# Altium PCB PCB1.PcbDoc
Units mil, origin at the board's own origin, x right, y up, seen from the top; angles counter-clockwise.
Board outline 1181.1 x 1594.49 mil, 2 copper layers (Top Layer, Bottom Layer), stack 61.756 mil thick; 54 components, 60 nets, 309 pads, 117 vias.
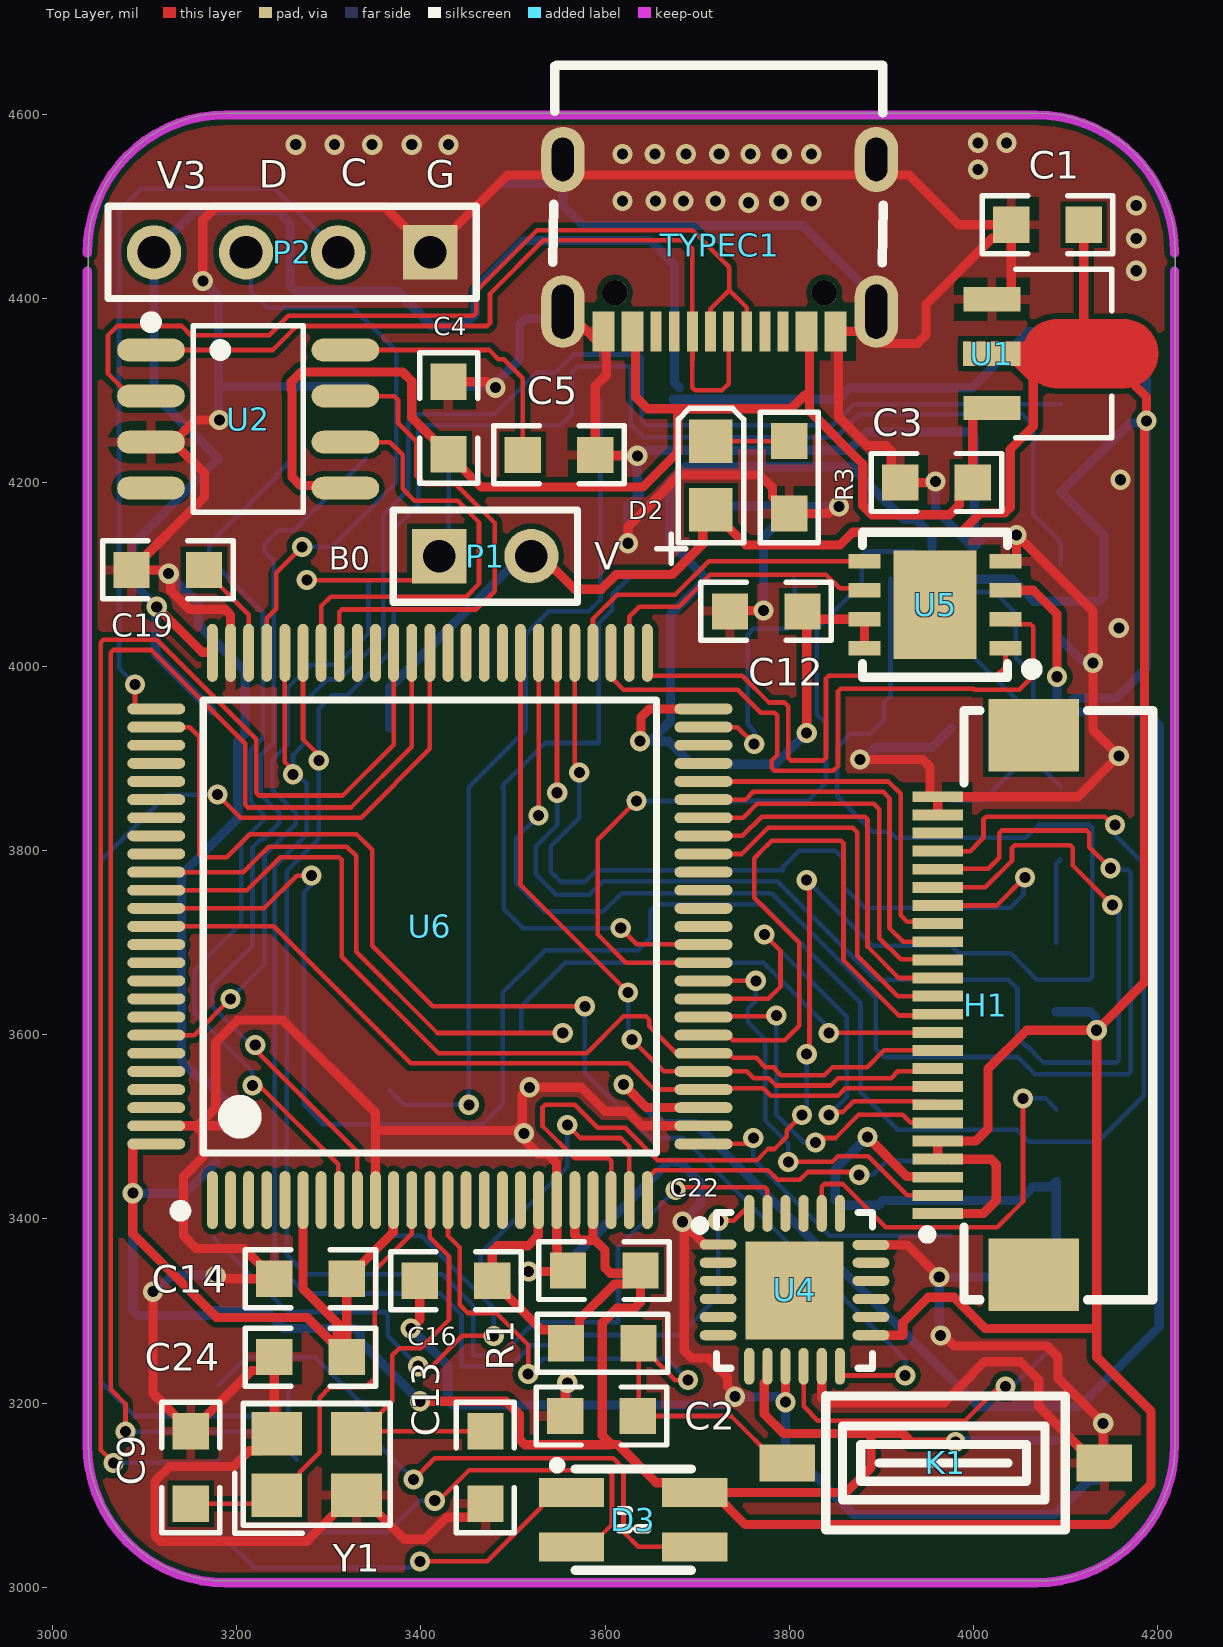
[diagram p0: Top Layer view]
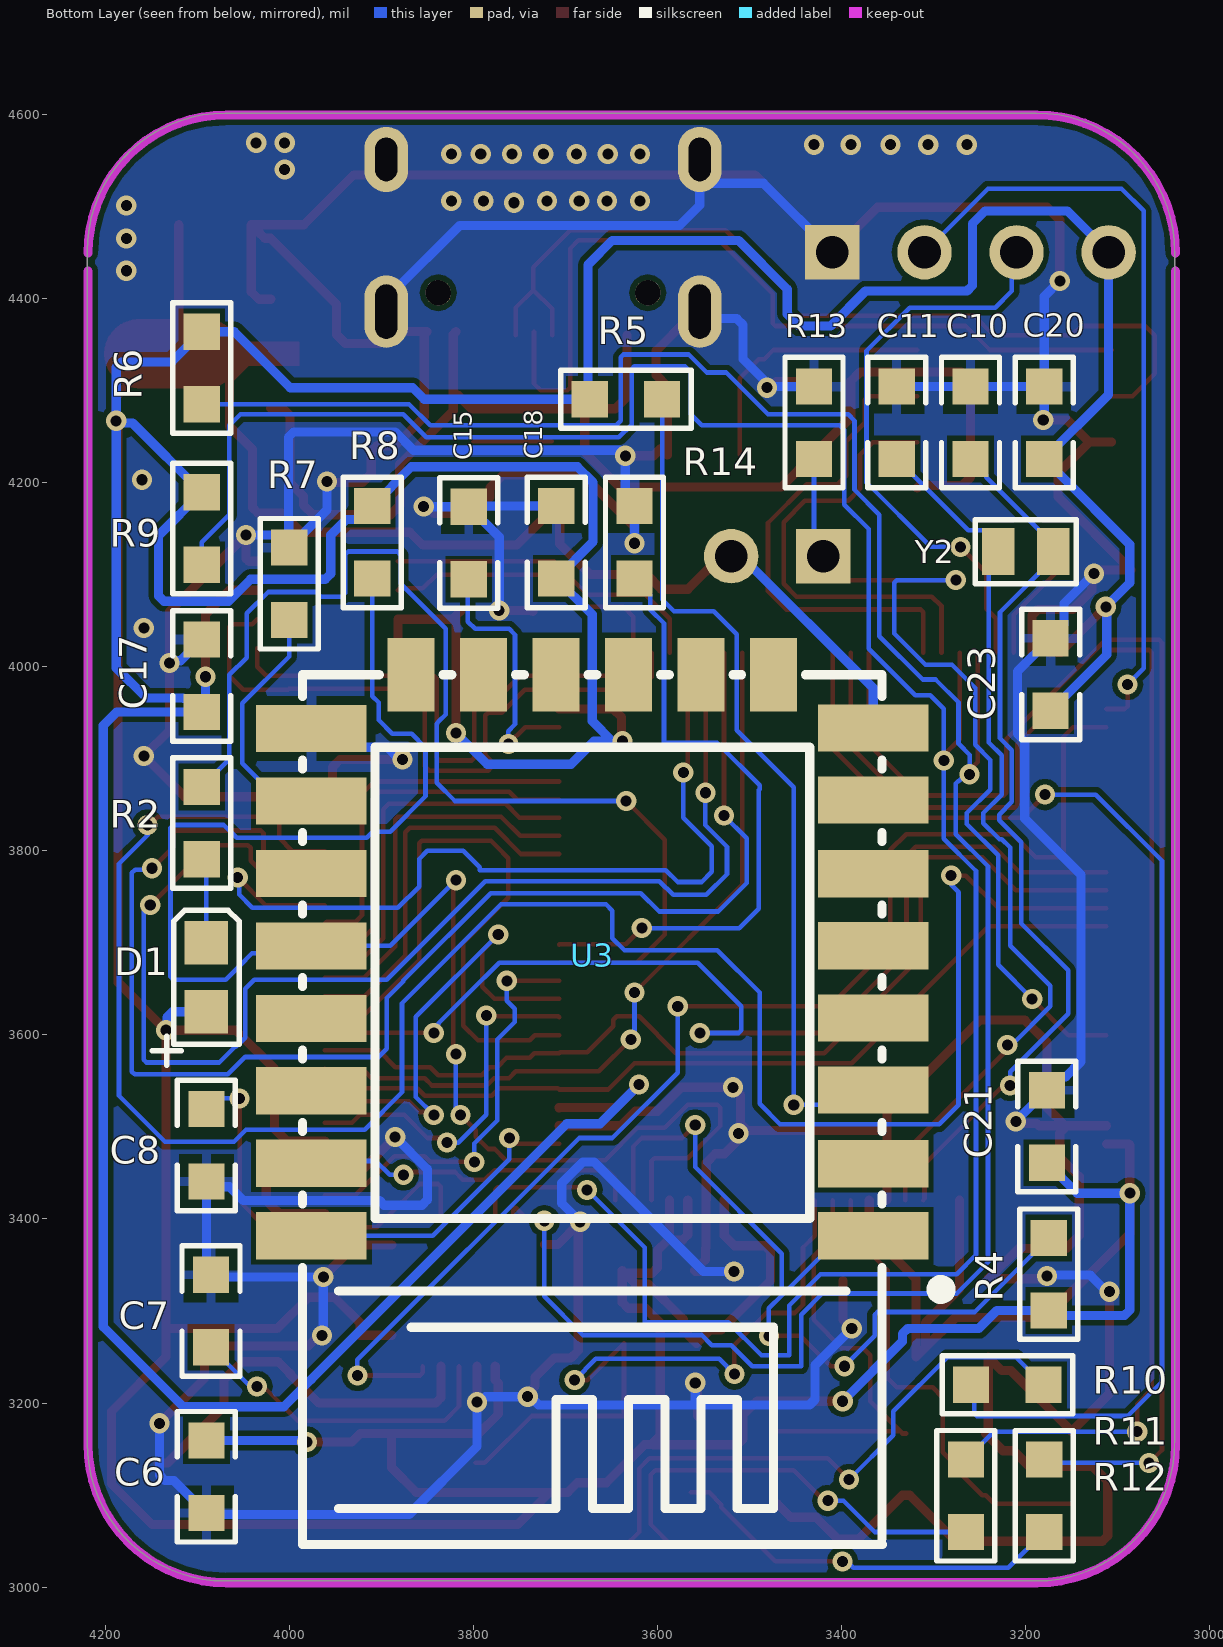
[diagram p1: Bottom Layer view, seen from below]

## Layer stack, top to bottom
Top Solder: solder mask 1, SM-001, Dk 4
Top Layer: signal copper 1.378
Dielectric 1: core 59, Core-043, Dk 4.3
Bottom Layer: signal copper 1.378
Bottom Solder: solder mask 1, SM-001, Dk 4

## Board outline
3038.43,3156.77 ccw(c3188.43,3156.77) 3188.43,3006.77 4069.53,3006.77 ccw(c4069.53,3156.77) 4219.53,3156.77 4219.53,4451.26 ccw(c4069.53,4451.26) 4069.53,4601.26 3188.43,4601.26 ccw(c3188.43,4451.26) 3038.43,4451.26

## Design rules (kind name [scope] priority, off if disabled: settings)
Clearance [All] p1: gap=6 ignorepadtopadclearanceinfootprint=TRUE
PlaneClearance [All] p1: clearance=8
PlaneConnect [All] p1: planeconnectstyle=Direct reliefexpansion=20 reliefentries=4 reliefconductorwidth=10 reliefairgap=10
PolygonConnect [All] p1: thpad.connectstyle=Direct thpad.reliefconductorwidth=10 thpad.reliefentries=4 thpad.polygonreliefangle="90 Angle" thpad.airgapwidth=10 smdpad.connectstyle=Relief smdpad.reliefconductorwidth=10 smdpad.reliefentries=4 smdpad.polygonreliefangle="90 Angle" smdpad.airgapwidth=10 via.connectstyle=Direct via.reliefconductorwidth=10 via.reliefentries=4 via.polygonreliefangle="90 Angle" via.airgapwidth=10
RoutingVias [All] p1: holewidth=12 width=22 viastyle="Through Hole" minholewidth=12 minwidth=22 maxholewidth=12 maxwidth=22
SilkToSolderMaskClearance [IsPad] p1: minsilkscreentomaskgap=2 clearancetoexposedcopper=TRUE
SolderMaskExpansion [All] p1: expansion=4 istentingtop=FALSE
Width PWR_Width [InNetClass('PWR')] p1: maxlimit=10 minlimit=10 preferedwidth=10
Width [All] p2: maxlimit=5 minlimit=5 preferedwidth=5
27 further rules are at their usual default settings.

## Classes and differential pairs
net class PWR: GND V3.3 V5

## Components (designator, comment, footprint, x,y, rotation, side; value= is the part's Value field where it differs from the comment)
C1 "226" 0805C 4080.63,4480 r180 top
C2 "104" 0805C 3596,3186 r0 top
C3 "106" 0805C 3960,4200 r0 top
C4 "104" 0805C 3430,4270 r270 top
C5 "104" 0805C 3550,4230 r180 top
C6 "10nF" 0805C 4090,3120 r270 bottom
C7 "104" 0805C 4085,3300 r90 bottom
C8 "2.2nF" 0805C 4090,3480 r270 bottom
C9 "22pF" 0805C 3150,3130 r270 top
C10 "10pF" 0805C 3260,4265 r270 bottom
C11 "10pF" 0805C 3340,4265 r270 bottom
C12 "104" 0805C 3775,4060 r0 top
C13 "22pF" 0805C 3470,3130 r270 top
C14 "104" 0805C 3280,3335 r0 top
C15 "225" 0805C 3805,4134.37 r270 bottom
C16 "104" 0805C 3438,3333 r0 top
C17 "104" 0805C 4095,3990 r270 bottom
C18 "104" 0805C 3710,4135 r270 bottom
C19 "225" 0805C 3125,4105 r0 top
C20 "104" 0805C 3180,4265 r270 bottom
C21 "104" 0805C 3177,3500.37 r270 bottom
C22 "104" 0805C 3599,3344 r0 top
C23 "104" 0805C 3173.03,3991.38 r270 bottom
C24 "104" 0805C 3280,3250 r0 top
D1 "LED" 0805D 4090,3662.4 r90 bottom
D2 "LED" 0805D 3715,4207.6 r90 top
D3 "RGB" RGB 3630.55,3074.89 r0 top
H1 "LCD_FPC24P" FPC24 4080,3635 r90 top
K1 "KEY" Key3x6x2.5 3970,3135 r90 top
P1 "Header 2" HDR1X2 3420,4120 r0 top
P2 "Header 4" HDR1X4 3410,4450 r180 top
R1 "10k" 0805R 3597,3265 r180 top
R2 "680R" 0805R 4095,3830 r270 bottom
R3 "680R" 0805R 3800,4205.63 r90 top
R4 "10k" 0805R 3175,3340 r270 bottom
R5 "10k" 0805R 3634.37,4290.31 r0 bottom
R6 "4.7k" 0805R 4095,4324.37 r90 bottom
R7 "10k" 0805R 4000,4090 r270 bottom
R8 "10k" 0805R 3910,4135 r90 bottom
R9 "4.7k" 0805R 4095,4150 r90 bottom
R10 "1k" 0805R 3220,3220 r180 bottom
R11 "1k" 0805R 3265,3099.37 r270 bottom
R12 "680R" 0805R 3180,3099.37 r270 bottom
R13 "10k" 0805R 3430,4265 r270 bottom
R14 "10k" 0805R 3625,4135 r270 bottom
TYPEC1 "Typec_16Pin" TYPEC_16PIN 3739.17,4503.31 r180 top
U1 "AMS1117-3.3" SOT-89 4095,4340 r180 top
U2 "CH340N" CH340N 3210,4270 r270 top
U3 "ESP826612E" ESP826612E 3700.55,3630 r90 bottom
U4 "MPU6050" MPU6050 3798.02,3322.99 r270 top
U5 "W25Q64" W25Q64 3958.45,4067.24 r180 top
U6 "STM32F407VE" STM32F407VET6 3405,3740 r0 top
Y1 "OSC25M" OSC25M 3282.19,3128.97 r0 top
Y2 "OSC32K" OSC32K 3203.03,4122.01 r180 bottom

## Footprints (in the part's own frame and the unit in brackets; to place one, negate y for a bottom-side part, rotate by r counter-clockwise, add the part's x,y. Pads: shape width x height; smd on the part's side, far side on the other; paste and mask are expansions set on the pad)
0805C [mm]
  rect 1x1 smd: 1(-1,0) 2(1,0)
  silkscreen extent -1.8,-0.8 1.8,0.8
0805D [mm]
  rect 1.2x1.2 smd: 1(0.95,0) 2(-0.95,0)
  silkscreen extent -2.42,-0.9 1.85,1.49
0805R [mm]
  rect 1x1 smd: 1(-1,0) 2(1,0)
  silkscreen extent -1.8,-0.8 1.8,0.8
CH340N [mm]
  oval 0.63x1.865 smd: 1(-1.877,-2.624) 2(-0.607,-2.624) 3(0.663,-2.624) 4(1.933,-2.624) 5(1.933,2.741) 6(0.663,2.741) 7(-0.607,2.741) 8(-1.877,2.741)
  silkscreen extent -2.79,-2.77 2.6,1.58, body extent -2.67,-2.67 2.92,2.67, height 0.25
ESP826612E [mil]
  rect 51.18x120 smd: 1(-248.25,-334.85) 2(-170,-334.85) 3(-90,-334.85) 4(-11.75,-334.85) 5(66.75,-334.85) 6(145,-334.85) 7(225,-334.85) 8(303.25,-334.85) 15(302.94,275.39) 16(224.19,275.39) 17(145.45,275.39) 18(66.71,275.39) 19(-12.03,275.39) 20(-90.77,275.39) 21(-169.51,275.39) 22(-248.25,275.39)
  rect 80x51.18 smd: 9(361.2,-226.63) 10(361.14,-147.89) 11(361.16,-69.15) 12(361.16,9.59) 13(361.16,88.33) 14(361.19,167.07)
  silkscreen extent -584,-416 361,285, body extent -585,-345 365,285, height 10
FPC24 [mm]
  rect 0.3x1.397 smd: 1(-5.819,3.012) 2(-5.319,3.012) 3(-4.819,3.012) 4(-4.319,3.012) 5(-3.819,3.012) 6(-3.319,3.012) 7(-2.819,3.012) 8(-2.319,3.012) 9(-1.819,3.012) 10(-1.319,3.012) 11(-0.819,3.012) 12(-0.319,3.012) 13(0.181,3.012) 14(0.681,3.012) 15(1.181,3.012) 16(1.681,3.012) 17(2.181,3.012) 18(2.681,3.012) 19(3.181,3.012) 20(3.681,3.012) 21(4.181,3.012) 22(4.681,3.012) 23(5.181,3.012) 24(5.681,3.012)
  rect 2x2.5 smd: ""(-7.509,0.363) ""(7.371,0.363)
  silkscreen extent -8.2,-2.92 8.06,3.43
HDR1X2 [mm] "Connector; Header; 2 Position"
  rect 1.5x1.5 hole 0.9: 1(0,0)
  round 1.5 hole 0.9: 2(2.54,0)
  silkscreen extent -1.27,-1.27 3.81,1.27
HDR1X4 [mm] "Connector; Header; 4 Position"
  rect 1.5x1.5 hole 0.9: 1(0,0)
  round 1.5 hole 0.9: 2(2.54,0) 3(5.08,0) 4(7.62,0)
  silkscreen extent -1.27,-1.27 8.89,1.27
Key3x6x2.5 [mil]
  rect 40x60 smd: 1(0,172.24) 2(0,-172.24)
  silkscreen extent -73,-130 73,130
MPU6050 [mm]
  oval 0.28x1.016 smd: 1(-1.25,-1.911) 2(-0.75,-1.911) 3(-0.25,-1.911) 4(0.25,-1.911) 5(0.75,-1.911) 6(1.25,-1.911) 13(1.25,2.305) 14(0.75,2.305) 15(0.25,2.305) 16(-0.25,2.305) 17(-0.75,2.305) 18(-1.242,2.305)
  oval 1.016x0.28 smd: 7(2.108,-1.053) 8(2.108,-0.553) 9(2.108,-0.053) 10(2.108,0.447) 11(2.108,0.947) 12(2.108,1.447) 19(-2.108,1.447) 20(-2.108,0.947) 21(-2.108,0.447) 22(-2.108,-0.053) 23(-2.108,-0.553) 24(-2.108,-1.053)
  rect 2.7x2.7 smd: ""(0.012,0.197)
  silkscreen extent -2.14,-2.67 2.16,2.35, body extent -2.16,-1.91 2.16,2.29, height 0.25
OSC25M [mm]
  rect 1.4x1.2 smd: 1(-0.986,-0.736) 2(1.214,-0.736) 3(1.214,0.964) 4(-0.986,0.964)
  silkscreen extent -2.14,-1.79 2.14,1.79
OSC32K [mm]
  rect 0.9x1.3 smd: 1(-0.685,0.076) 2(0.839,0.076)
  silkscreen extent -1.32,-0.81 1.47,0.96
RGB [mm]
  rect 1.8x0.8 smd: 1(-1.7,0.713) 2(1.7,0.713) 3(1.7,-0.787) 4(-1.7,-0.787)
  silkscreen extent -2.2,-1.44 1.6,1.56
SOT-89 [mm]
  rect 1.575x0.672 smd: 1(1.901,-1.5) 2(1.905,0) 3(1.901,1.5)
  Top Layer region: -1.739,0.95 0.116,0.95 0.16,0.949 0.204,0.946 0.249,0.941 0.293,0.933 0.336,0.924 0.379,0.913 0.422,0.899 0.464,0.884 0.505,0.867 0.545,0.847 0.584,0.826 0.622,0.804 0.659,0.779 0.695,0.753 0.73,0.725 0.763,0.695 0.795,0.664 0.825,0.631 0.854,0.597 0.881,0.562 0.907,0.525 0.931,0.488 0.953,0.449 0.973,0.409 0.991,0.33 2.688,0.33 2.688,-0.33 0.991,-0.33 0.973,-0.409 0.953,-0.449 0.931,-0.488 0.907,-0.526 0.881,-0.562 0.854,-0.597 0.825,-0.631 0.795,-0.664 0.763,-0.695 0.73,-0.725 0.695,-0.753 0.659,-0.779 0.622,-0.804 0.584,-0.826 0.545,-0.847 0.505,-0.867 0.464,-0.884 0.422,-0.899 0.379,-0.913 0.336,-0.924 0.293,-0.933 0.249,-0.941 0.204,-0.946 0.16,-0.949 0.116,-0.95 -1.739,-0.95 -1.783,-0.949 -1.828,-0.946 -1.872,-0.941 -1.916,-0.933 -1.959,-0.924 -2.002,-0.913 -2.045,-0.899 -2.087,-0.884 -2.128,-0.867 -2.168,-0.847 -2.207,-0.826 -2.245,-0.804 -2.283,-0.779 -2.318,-0.753 -2.353,-0.725 -2.386,-0.695 -2.418,-0.664 -2.449,-0.631 -2.477,-0.597 -2.505,-0.562 -2.53,-0.526 -2.554,-0.488 -2.576,-0.449 -2.596,-0.409 -2.614,-0.369 -2.631,-0.327 -2.645,-0.285 -2.657,-0.242 -2.668,-0.199 -2.676,-0.155 -2.682,-0.111 -2.686,-0.067 -2.688,-0.022 -2.688,0.022 -2.686,0.067 -2.682,0.111 -2.676,0.155 -2.668,0.199 -2.657,0.242 -2.645,0.285 -2.631,0.327 -2.614,0.369 -2.596,0.409 -2.576,0.449 -2.554,0.488 -2.53,0.525 -2.505,0.562 -2.477,0.597 -2.449,0.631 -2.418,0.664 -2.386,0.695 -2.353,0.725 -2.318,0.753 -2.283,0.779 -2.245,0.804 -2.207,0.826 -2.168,0.847 -2.128,0.867 -2.087,0.884 -2.045,0.899 -2.002,0.913 -1.959,0.924 -1.916,0.933 -1.872,0.941 -1.828,0.946 -1.783,0.949
  silkscreen extent -1.41,-2.33 1.25,2.33
STM32F407VET6 [mm]
  oval 0.3x1.6 smd: 1(-5.881,-8.115) 2(-5.381,-8.115) 3(-4.881,-8.115) 4(-4.381,-8.115) 5(-3.881,-8.115) 6(-3.381,-8.115) 7(-2.881,-8.115) 8(-2.381,-8.115) 9(-1.881,-8.115) 10(-1.381,-8.115) 11(-0.881,-8.115) 12(-0.381,-8.115) 13(0.119,-8.115) 14(0.619,-8.115) 15(1.119,-8.115) 16(1.619,-8.115) 17(2.119,-8.115) 18(2.619,-8.115) 19(3.119,-8.115) 20(3.619,-8.115) 21(4.119,-8.115) 22(4.619,-8.115) 23(5.119,-8.115) 24(5.619,-8.115) 25(6.119,-8.115) 51(6.119,6.985) 52(5.619,6.985) 53(5.119,6.985) 54(4.619,6.985) 55(4.119,6.985) 56(3.619,6.985) 57(3.119,6.985) 58(2.619,6.985) 59(2.119,6.985) 60(1.619,6.985) 61(1.119,6.985) 62(0.619,6.985) 63(0.119,6.985) 64(-0.381,6.985) 65(-0.881,6.985) 66(-1.381,6.985) 67(-1.881,6.985) 68(-2.381,6.985) 69(-2.881,6.985) 70(-3.381,6.985) 71(-3.881,6.985) 72(-4.381,6.985) 73(-4.881,6.985) 74(-5.381,6.985) 75(-5.881,6.985)
  oval 1.6x0.3 smd: 26(7.669,-6.565) 27(7.669,-6.065) 28(7.669,-5.565) 29(7.669,-5.065) 30(7.669,-4.565) 31(7.669,-4.065) 32(7.669,-3.565) 33(7.669,-3.065) 34(7.669,-2.565) 35(7.669,-2.065) 36(7.669,-1.565) 37(7.669,-1.065) 38(7.669,-0.565) 39(7.669,-0.065) 40(7.669,0.435) 41(7.669,0.935) 42(7.669,1.435) 43(7.669,1.935) 44(7.669,2.435) 45(7.669,2.935) 46(7.669,3.435) 47(7.669,3.935) 48(7.669,4.435) 49(7.669,4.935) 50(7.669,5.435) 76(-7.431,5.435) 77(-7.431,4.935) 78(-7.431,4.435) 79(-7.431,3.935) 80(-7.431,3.435) 81(-7.431,2.935) 82(-7.431,2.435) 83(-7.431,1.935) 84(-7.431,1.435) 85(-7.431,0.935) 86(-7.431,0.435) 87(-7.431,-0.065) 88(-7.431,-0.565) 89(-7.431,-1.065) 90(-7.431,-1.565) 91(-7.431,-2.065) 92(-7.431,-2.565) 93(-7.431,-3.065) 94(-7.431,-3.565) 95(-7.431,-4.065) 96(-7.431,-4.565) 97(-7.431,-5.065) 98(-7.431,-5.565) 99(-7.431,-6.065) 100(-7.431,-6.565)
  silkscreen extent -6.91,-8.56 6.37,5.69, body extent -7.62,-7.62 7.75,6.98, height 0.25
TYPEC_16PIN [mm]
  rect 0.6x1.1 smd: 1(-2.824,3.54) 2(-2.024,3.54) 11(2.776,3.54) 12(3.576,3.54)
  rect 0.3x1.1 smd: 3(-1.374,3.54) 4(-0.874,3.54) 5(-0.374,3.54) 6(0.126,3.54) 7(0.626,3.54) 8(1.126,3.54) 9(1.626,3.54) 10(2.126,3.54)
  oval 1.2x2 hole 0.6 slot 1.5 at 90 deg: 13(-3.949,2.99) 14(4.701,2.99)
  oval 1.2x1.8 hole 0.6 slot 1.2 at 90 deg: 15(-3.949,-1.21) 16(4.701,-1.21)
  round 0.7 hole 0.7 unplated: ""(-2.514,2.47) ""(3.266,2.47)
  silkscreen extent -4.14,-3.81 4.98,1.65, body extent -5.65,-4 5.91,3.24, height 0.25
W25Q64 [mm]
  rect 0.889x0.4 smd: 1(-1.944,1.2) 2(-1.944,0.4) 3(-1.944,-0.4) 4(-1.944,-1.2) 5(1.944,-1.2) 6(1.944,-0.4) 7(1.944,0.4) 8(1.944,1.2)
  rect 2.3x3 smd: ""(0,0)
  silkscreen extent -2.82,-2 2,2, body extent -2.03,-2.03 2.79,2.41, height 0.25

## Part data
C1 C2 C3 C4 C5 C6 C7 C8 C9 C10 C11 C12 C13 C14 C15 C16 C17 C18 C19 C20 C21 C22 C23 C24: library part CAP, "电容"
D1 D2: "LED灯"
K1: "按键"
P1: "Header, 2-Pin", LatestRevisionDate=17-Jul-2002, LatestRevisionNote="Re-released for DXP Platform.", Publisher="Altium Limited"
P2: "Header, 4-Pin", LatestRevisionDate=17-Jul-2002, LatestRevisionNote="Re-released for DXP Platform.", Publisher="Altium Limited"
R1 R2 R3 R4 R5 R6 R7 R8 R9 R10 R11 R12 R13 R14: library part RES, "电阻"
U1: "IC"
U6: library part STM32F407VET6

## Via types
v1: diameter 22, hole 12, Top Layer to Bottom Layer, tented both sides, 117 vias

## Nets (pads, with @x,y where several pads share a name; then routed paths per layer and width w, separated by ;. In a path a pad name is that pad's centre, name@x,y a point inside that pad or via, vN(x,y) a via of type N, cw(c..) or ccw(c..) an arc to the next point about the centre after c; other vN are vias at no path point)
BOOT0: P1.1 R13.2 U6.94 | length 981.7
  Top Layer w5: U6.94 3153.65,3599.65 v1(3193,3639) ; v1(3276,4094) 3394,4094 P1.1
  Bottom Layer w5: v1(3193,3639) 3230,3676 3230,3795 3264,3829 3264,3841 3238.61,3866.39 3238.61,3898.61 3255,3915 3255,3976.75 3280.12,4001.88 3308.88,4001.88 3343,4036 3343,4091.07 3340.07,4094 v1(3276,4094) ; P1.1 3430,4130 R13.2
ESP_IO0: R8.1 U3.18 U6.23 | length 1838.6
  Top Layer w5: U6.23 3606.53,3463.07 3603.6,3466 3567,3466 3532,3501 3532,3521.07 3534.93,3524 3567,3524 3592,3499 3621.93,3499 3656.93,3464 3765,3464 3777,3476 3784,3476 3797.37,3489.37 3797.37,3496.37 v1(3814,3513) ; v1(3819,3579) 3822,3582 3822,3765 v1(3819,3768)
  Bottom Layer w5: v1(3814,3513) 3819,3518 v1(3819,3579) ; v1(3819,3768) 3890.29,3696.71 U3.18 3984.17,3688.49 4040.51,3688.49 4054,3675 4069,3660 4126.07,3660 4129,3662.93 4129,3825.07 4126.07,3828 4071,3828 4057,3814 3916,3814 3909.5,3820.5 3890.5,3820.5 3852,3859 3852,3912 3867,3927 3888,3927 3903,3942 3903,3961 3910,3968 R8.1
ESP_RST: R4.1 U3.1 U6.24 | length 923.9
  Top Layer w5: v1(3397,3240) 3412,3240 3445,3273 v1(3479,3273) ; v1(3559,3502) 3573,3488 3617,3488 3626.22,3478.78 U6.24
  Bottom Layer w5: R4.1 3255.37,3299 3361.07,3299 3364,3296.07 3364,3273 v1(3397,3240) ; U3.1 3400.11,3381.75 3465,3316.87 ; v1(3479,3273) 3479,3302.87 3465,3316.87 ; v1(3559,3502) 3559,3456.43 3465,3362.43 3465,3316.87
FLASH_CS: U5.1 U6.51 | length 595.9
  Top Layer w5: U6.51 3645.9,3993.15 3649.05,3990 3749,3990 3778,3961 3795,3961 3799,3957 3799,3900.93 3801.93,3898 3837,3898 3840,3901 3840,3987.07 3842.93,3990 4025,3990 4035,4000 U5.1
FLASH_MISO: U5.2 U6.53 | length 746.6
  Top Layer w5: U6.53 3606.53,3988.47 3620,3975 3744,3975 3769,3950 3784.07,3950 3787,3947.07 3787,3904 3781.04,3898.04 3781.04,3889.93 3783.96,3887 3848,3887 3853,3892 3853,3973.07 3855.93,3976 4000.33,3976 4001.33,3975 4050,3975 4065,3990 4065,4043.19 4062.07,4046.12 4040.37,4046.12 U5.2
FLASH_MOSI: U5.5 U6.54 | length 357.8
  Top Layer w5: U6.54 3586.85,4051.85 3613,4078 3676,4078 3712.49,4114.49 U5.5
FLASH_SCL: U5.6 U6.52 | length 321.5
  Top Layer w5: U6.52 3626.22,4054.22 3637,4065 3680,4065 3702,4087 3702,4088 3714,4100 3840,4100 3855,4085 3879.88,4085 U5.6
FSMC_D8: H1.13 U6.42 | length 420.5
  Top Layer w5: U6.42 3748.5,3796.5 3777,3825 3869,3825 3874,3820 3874,3686 3917.87,3642.13 H1.13
FSMC_D9: H1.14 U6.43 | length 416.5
  Top Layer w5: U6.43 3749.19,3816.19 3770,3837 3882,3837 3885,3834 3885,3696 3919.19,3661.81 H1.14
FSMC_D10: H1.15 U6.44 | length 413
  Top Layer w5: U6.44 3749.87,3835.87 3765,3851 3892,3851 3898,3845 3898,3705 3921,3682 3960.91,3682 H1.15
FSMC_D11: H1.16 U6.45 | length 408
  Top Layer w5: U6.45 3752.56,3855.56 3761,3864 3902,3864 3909,3857 3909,3716 3923.82,3701.18 H1.16
FSMC_D12: H1.17 U6.46 | length 395.8
  Top Layer w5: U6.46 3907.76,3875.24 3921,3862 3921,3730 3928,3723 3959.28,3723 H1.17
FSMC_D13: H1.18 U6.55 | length 962.3
  Top Layer w5: U6.55 3567.16,3894.44 3572,3889.6 v1(3572,3885) ; H1.18 4025.55,3740.55 v1(4056,3771)
  Bottom Layer w5: v1(3572,3885) 3572,3836 3541,3805 3541,3777 3552,3766 3578,3766 3591,3779 3793,3779 3793,3782 3811,3800 3850,3800 3859,3791 3859,3761 3882,3738 4040,3738 4054.5,3752.5 4054.5,3769.5 v1(4056,3771)
FSMC_D14: H1.19 U6.56 | length 1439.1
  Top Layer w5: U6.56 3547.74,4014.74 3547.74,3863.26 v1(3548,3863) ; H1.19 4013,3760.24 4042,3789.24 4042,3803.07 4044.93,3806 4105.07,3806 4108,3803.07 4108,3784 v1(4151,3741)
  Bottom Layer w5: v1(3548,3863) 3548,3828 3524.5,3804.5 3524.5,3774.5 3547,3752 3583,3752 3598,3767 3787,3767 3894,3660 4038,3660 4048,3650 4048,3597 4058,3587 4059,3587 4076,3570 4155.07,3570 4158,3572.93 4158,3734 v1(4151,3741)
FSMC_D15: H1.20 U6.57 | length 1552.6
  Top Layer w5: v1(3527.79,3838.21) U6.57 ; H1.20 3961.96,3780.46 4016,3780.46 4028,3792.46 4028,3819.07 4030.93,3822 4123.07,3822 4126,3819.07 4126,3804 4148.46,3781.54 4148.46,3780.46 v1(4149,3781)
  Bottom Layer w5: v1(3527.79,3838.21) 3503,3813.42 3503,3765 3534,3734 3598,3734 3618,3754 3781,3754 3876,3659 3876,3658 3894,3640 3894,3585 3903,3576 4048,3576 4067,3557 4168,3557 4171,3560 4171,3776 4167.5,3779.5 4150.5,3779.5 v1(4149,3781)
FSMC_RD: H1.11 U6.85 | length 1177.5
  Top Layer w5: U6.85 3206.82,3776.82 3221,3791 3234.5,3804.5 3319.5,3804.5 3329.59,3794.41 3329.59,3690.41 3418,3602 v1(3554,3602) ; v1(3843,3602) 3843.38,3602.38 3961.04,3602.38 H1.11
  Bottom Layer w5: v1(3554,3602) 3511.93,3602 3509,3604.93 3509,3631 3556.5,3678.5 3772.08,3678.5 3805.91,3644.66 3837.71,3612.87 3837.71,3611.89 3843,3606.6 v1(3843,3602)
GND: C1.2 C2.1 C3.1 C4.1 C5.1 C6.2 C7.2 C8.2 C9.1 C10.1 C11.1 C12.1 C13.2 C14.1 C15.1 C16.1 C17.1 C18.1 C19.1 C20.1 C21.1 C22.1 C23.1 C24.1 H1.3 H1.23 H1.24 K1.2 P2.1 R3.1 R7.1 R13.1 R14.1 TYPEC1.1 TYPEC1.12 TYPEC1.13 TYPEC1.14 TYPEC1.15 TYPEC1.16 U1.1 U2.3 U3.15 U4.1 U4.9 U4.11 U4.18 U5.4 U6.10 U6.20 U6.27 U6.74 U6.99 Y1.2 Y1.4 | length 12102.9
  Top Layer w10: U2.3 U2.3@3131.02,4243.88 ; v1(3109,3321) 3109,3210.37 C9.1 3215.94,3235.31 3225.94,3235.31 C24.1 3240.63,3169.69 Y1.4 3224.76,3148.31 3213.31,3148.31 3196,3131 3127,3131 3111,3115 3111,3055.86 3116.86,3050 3276.06,3050 3326.06,3100 Y1.2 3333.94,3100 3381.94,3052 3404,3052 3427.94,3075.94 3455.31,3075.94 C13.2 ; U6.99 3154.78,3501.22 ; v1(3163,4419) 3163,4485 3177,4499 3361,4499 3404,4456 3416,4456 3494.14,4534.14 3506.22,4534.14 3930,4534.13 3984.13,4480 C1.2@4035,4480 ; v1(3177,3338) 3180,3335 C14.1 3207.63,3368 3156,3368 3142,3382 3142,3446 3163,3467 3163,3493 3154.78,3501.22 ; v1(3181,4268) 3180.86,4267.86 3155,4267.86 U2.3@3131.02,4243.88 ; U6.74 3193.14,4055.86 3187,4062 3149,4062 3128.3,4082.7 3128.3,4098.7 v1(3126,4101) 3122.75,4101 3118.75,4105 C19.1 3165,4184.37 3165,4209.9 U2.3@3131.02,4243.88 ; v1(3210.74,3506) 3208.44,3503.7 3187.99,3503.7 3185.5,3501.22 3157.22,3501.22 ; U6.10 3350.62,3496 ; v1(3389,3281) 3398.63,3290.63 C16.1 ; C4.1 3471.38,4309.37 3477.75,4303 v1(3481,4303) ; v1(3517,3343) 3558.63,3343 C22.1 3548,3355.63 3548,3368 3547.48,3368.52 U6.20 3547.13,3420.87 3547.13,3460.87 3537.2,3470.8 3527.2,3470.8 v1@3502,3496 ; C2.1 3556.63,3219.63 v1(3559,3222) ; TYPEC1.14@3568.03,4376.65 3601.5,4343.19 3601.5,4316.81 3589.37,4304.69 C5.1 3596.37,4237 3604.37,4229 v1(3635,4229) ; v1(3625,4134) 3625,4152 3673,4200 3673,4201 3680,4208 3768,4208 3782,4194 3782,4184.26 R3.1 3843.01,4166.26 3850.75,4174 v1(3854,4174) ; v1(3684,3397) 3686,3395 v1@3686,3394.49 ; U6.27 3639.78,3501.22 3624,3517 3600,3517 3574,3543 v1(3518,3543) 3510,3535 3510,3504 v1@3502,3496 ; U4.1 3708.3,3372.19 v1@3686,3394.49 ; C12.1 3736.63,4061 v1(3772,4061) ; v1(3741,3207) 3741,3210.25 3733,3218.25 3733,3228 3712,3249 3694,3249 3686,3257 v1@3686,3394.49 ; v1(3795.95,3201.05) U4.9 ; U4.11 3835.32,3205.86 3841.18,3200 3968,3200 3999,3231 3999,3232 4012,3245 4051.14,3245 4071,3225.14 4071,3196.24 4132.24,3135 K1.2 4141,3136.24 v1(4141,3178) 4092,3227 4092,3250 4080,3262 3979.25,3262 3967.75,3273.5 v1(3964.5,3273.5) ; v1(3877,3899) 3945,3899 3953,3891 3953,3859.57 3953.91,3858.66 H1.24 ; v1(3885,3489) 3927.82,3446.18 3960.51,3446.18 H1.3 ; U4.18 3928.12,3371.88 v1(3963,3337) ; TYPEC1.13@3894.65,4358.03 3901.68,4351 3939,4351 3948.74,4360.74 3948.74,4393.74 4020.31,4465.31 4026.57,4465.31 4035,4473.74 C1.2@4035,4480 ; TYPEC1.13 3894.65,4381.15 3877.44,4363.94 TYPEC1.1 3853.46,4360.83 3853.46,4271.54 3885,4240 3905,4240 3910.86,4234.14 3910.86,4209.77 C3.1 3958,4200 v1(3959,4201) ; H1.23 H1.24 ; U1.1 4033.03,4399.04 4041.26,4407.27 C1.2 C1.2@4035,4480 ; U5.4 4044.13,4114.49 4047,4117.36 v1(4047,4143) 4130,4060 v1(4130,4004) 4130,3931 v1(4158,3903) 4113.66,3858.66 H1.24 ; 3154.78,3501.22 3157.22,3501.22 ; 3157.22,3501.22 3177,3521 3177,3592 3201,3616 3250,3616 3350.62,3515.38 3350.62,3496 ; 3350.62,3496 v1@3502,3496
  Bottom Layer w10: v1(3109,3321) 3112,3321 3130,3339 3176,3339 v1(3177,3338) ; v1(3126,4101) 3158.35,4068.65 3158.35,4045.43 C23.1 3209,3994.78 3209,3927 3201,3919 3201,3835 3140,3774 3140,3571 3156.57,3554.43 3162.31,3554.43 v1(3210.74,3506) ; v1(3163,4419) 3180,4402 C20.1 ; v1(3181,4268) 3180,4269 C20.1 ; C11.1 C10.1 C20.1 ; v1(3389,3281) 3429,3241 3429,3203.86 3434.86,3198 3559,3198 ; P2.1 3485,4525 3529.2,4525 3529.3,4525.1 3552.38,4525.1 3554.09,4523.39 3554.09,4501.27 3576,4479.36 3576,4479.15 3814.85,4479.15 3887.52,4406.48 3887.52,4365.16 TYPEC1.13@3894.65,4358.03 ; R13.1 v1@3477.37,4304.37 ; v1@3478.5,4305.5 3507,4334 3507,4371 3514,4378 3546.5,4378 TYPEC1.14 ; v1(3517,3343) 3550,3343 3669,3462 3681,3462 3704,3439 3704,3417 v1(3684,3397) ; v1(3559,3222) 3559,3198 ; v1(3625,4134) R14.1 3638,4187.37 3635,4190.37 v1(3635,4229) 3641,4235 3865,4235 3885,4255 3995.14,4255 4001,4249.14 R7.1@4001,4130.37 ; C18.1 C15.1@3804.37,4174.37 ; v1(3772,4061) 3772,4140.74 3804.37,4173.11 C15.1@3804.37,4174.37 ; v1(3854,4174) 3853.74,4173.74 C15.1 C15.1@3804.37,4174.37 ; v1(3877,3899) 3880.25,3899 3893.6,3912.35 3955.35,3912.35 U3.15 ; v1(3885,3489) 3850,3454 3850,3420.86 3855.86,3415 3897,3415 3902,3420 4050,3420 4065,3435 4084.37,3435 C8.2 4090,3344.37 C7.2 4082.63,3337 v1(3963,3337) 3963,3275 v1(3964.5,3273.5) v1@3966,3272 ; v1(3959,4201) 3959,4170.37 R7.1 R7.1@4001,4130.37 ; v1(4047,4143) 4013.63,4143 R7.1@4001,4130.37 ; C17.1 4118.07,4006.3 4127.7,4006.3 v1(4130,4004) ; v1(4141,3178) 4141,3121.86 4135.14,3116 4125.37,3116 C6.2 4088.37,3079 3870,3079 3795.95,3153.05 v1(3795.95,3201.05) 3792.7,3201.05 3786.75,3207 3738.14,3207 3729.14,3198 3559,3198
  other v1: 3512,3493 4158,4042 4160,4203 4177,4430 4177,4465 4177,4501 3756,4503.87 3619,4505.87 3655,4505.87 3685,4505.87 3720,4505.87 3789,4505.87 3824,4505.87 4005,4540 3619,4556.87 3654,4556.87 3688,4556.87 3724,4556.87 3758,4556.87 3792,4556.87 3824,4556.87 3264,4567 3306,4567 3347,4567 3390,4567 3430,4567 4005,4569 4036,4569
IMU_IT: U4.12 U6.77 | length 1393.5
  Top Layer w5: U6.77 3148.7,3934.3 3159,3924 3159,3795.93 3161.93,3793 3189,3793 3214,3818 3330,3818 3347,3801 3347,3697 3413,3631 v1(3578,3631) ; U4.12 3855,3232.78 3857.78,3230 v1(3926,3230)
  Bottom Layer w5: v1(3578,3631) 3578,3559 3649,3488 3685.09,3488 3926,3247.09 v1(3926,3230)
IMU_SCL: R9.1 U4.23 U6.70 | length 2807.6
  Top Layer w5: U6.70 3271.88,3921.12 3289,3904 v1(3289,3898) ; v1(3676.5,3431.5) 3679.48,3434.48 3773.33,3434.48 3776.26,3431.55 U4.23
  Bottom Layer w5: v1(3676.5,3431.5) 3614,3369 3614,3288 3523,3288 3487,3252 3457,3252 3457,3306 3423,3340 3275,3340 3254,3361 3254,3778 3289,3813 v1(3289,3898) 3289,3954.15 3303.85,3969 3320,3969 3370.5,4019.5 3370.5,4149.5 3397,4176 3397,4257 3402,4262 3552,4262 3564,4274 3564,4320 3570.14,4326.14 3625.05,4326.14 3628,4323.2 3628,4262.93 3641.93,4249 3851,4249 3876,4274 4053,4274 4065,4262 4065,4165 4095,4135 R9.1
IMU_SDA: R6.1 U4.24 U6.71 | length 2672.8
  Top Layer w5: U6.71 3252.2,3896.4 3261,3887.6 v1(3261,3883) ; v1(3723,3398) 3739.8,3398 3753.8,3412 3756.58,3409.22 U4.24
  Bottom Layer w5: v1(3723,3398) 3723,3316 3681,3274 3552,3274 3541,3263 3520,3263 3497,3240 3444,3240 3444,3296 3421,3319 3275,3319 3241,3353 3241,3783 3276,3818 3276,3873 3272.79,3876.21 3272.39,3876.21 3265.6,3883 v1(3261,3883) 3261,3904 3273,3916 3273,3961 3298,3986 3312,3986 3359,4033 3359,4165 3386,4192 3386,4267 3393,4274 3480,4274 3525.5,4319.5 3546.5,4319.5 3566,4339 3637.07,4339 3640,4336.07 3640,4267 3645,4262 3847,4262 3870,4285 R6.1
LCD_BLK: H1.2 U6.35 | length 457.8
  Top Layer w5: U6.35 v1(3763.7,3658.7) ; v1(3799,3462) 3847,3462 3853,3468 3886,3468 3928.41,3425.59 H1.2
  Bottom Layer w5: v1(3763.7,3658.7) 3763.7,3637 3755,3628.3 3755,3614 3774,3595 3774,3507 3799,3482 v1(3799,3462)
LCD_CS: H1.8 U6.29 U6.88 | length 930.2
  Top Layer w5: U6.88 3240.24,3717.76 3389,3569 3625,3569 3653.41,3540.59 U6.29 3708.22,3541.89 3772,3541.89 3779.89,3534 3853,3534 3860.89,3541.89 3959.61,3541.89 H1.8
LCD_DC: H1.10 U6.31 U6.86 | length 1073.2
  Top Layer w5: U6.86 3211,3757.13 3246.93,3793.07 3310.93,3793.07 3314,3790 3314,3685 3419,3580 3580,3580 3620,3620 3644.4,3620 3647.97,3616.43 3647.97,3609.47 3672,3585.45 3676.18,3581.26 3705.62,3581.26 U6.31 3733.89,3579.96 3738.84,3575 3764,3575 3774,3565 3784,3565 3784,3563 3791,3556 3838,3556 3847,3565 3884.88,3565 3902.95,3583.07 H1.10
LCD_IM: H1.6 U6.33 | length 391.4
  Top Layer w5: U6.33 3707.76,3620.16 3785.16,3620.16 v1(3786,3621) ; v1(3828.6,3483) 3833.6,3488 3850.3,3488 3875.3,3513 3923.2,3513 3931.87,3504.33 H1.6
  Bottom Layer w5: v1(3786,3621) 3786,3513.42 3816.42,3483 v1(3828.6,3483)
LCD_RST: H1.7 U6.34 | length 520.4
  Top Layer w5: U6.34 3777.07,3639.02 3790.5,3652.45 3790.5,3691.5 v1(3773,3709) ; v1(3843,3513) 3846.25,3516.25 3858.25,3516.25 3870,3528 3933.49,3528 3934.07,3527.42 3958.01,3527.42 H1.7
  Bottom Layer w5: v1(3773,3709) 3862.5,3619.5 3862.5,3532.5 v1(3843,3513)
LCD_SCL: H1.9 U6.30 U6.58 | length 830.8
  Top Layer w5: U6.58 3508.11,3762.89 v1(3625,3646) ; v1(3629,3595) 3663.72,3560.28 U6.30 3754,3560.28 3761.28,3553 3777.64,3553 3785.64,3545 3845,3545 3853,3553 3910.72,3553 3918,3560.28 3958.31,3560.28 H1.9
  Bottom Layer w5: v1(3625,3646) 3625,3599 v1(3629,3595)
LCD_SDA: H1.12 U6.32 | length 676.4
  Top Layer w5: U6.32 3733.2,3599.65 3738.84,3594 3795,3594 3811,3610 3811,3700 3762,3749 3762,3792 3768,3798 3768,3798.07 3780.93,3811 3856.07,3811 3859,3808.07 3859,3681 3919,3621 3959.98,3621 H1.12
LCD_TE: H1.21 U6.87 | length 2258.5
  Top Layer w5: U6.87 3229.45,3737.45 3265,3773 v1(3281,3773) ; H1.21 3996.61,3799.61 4011,3814 4011,3834.07 4013.93,3837 4142.57,3837 4151.57,3828 v1(4154,3828)
  Bottom Layer w5: v1(3281,3773) 3281,3763 3273,3755 3273,3524 3294,3503 3467,3503 3489,3525 3489,3646 3535,3692 3635.86,3692 3649,3705.14 3649,3735 3656,3742 3770,3742 3877.5,3634.5 3877.5,3537.5 3918,3497 4047,3497 4060,3484 4135,3484 4185,3534 4185,3786 4154,3817 v1(4154,3828)
LED_B: R10.1 U6.63 | length 1352.1
  Top Layer w5: v1(3179,3861) 3204,3836 3335,3836 3409.68,3910.68 U6.63
  Bottom Layer w5: v1(3179,3861) 3124,3861 3052,3789 3052,3223 3089,3186 3253.07,3186 3256,3188.93 3256,3216.63 R10.1
LED_G: R11.1 U6.64 | length 1618.3
  Top Layer w5: v1(3079,3169) 3079,3199 3063,3215 3063,4015.07 3065.93,4018 3107,4018 3209,3916 3209,3849.93 3211.93,3847 3324,3847 3390,3913 U6.64
  Bottom Layer w5: v1(3079,3169) 3234.74,3169 R11.1
LED_R: R12.1 U6.65 | length 1558.6
  Top Layer w5: v1(3066,3135) 3052,3149 3052,4026.07 3054.93,4029 3113,4029 3221,3921 3221,3862.93 3223.93,3860 3315,3860 3370.31,3915.31 U6.65
  Bottom Layer w5: v1(3066,3135) 3176.26,3135 R12.1
NetC5_2: C5.2 U2.8 | length 288.7
  Top Layer w5: U2.8 3474.16,4343.88 3484.04,4334 3490,4334 3510.63,4313.37 C5.2
NetC7_1: C7.1 U4.10 | length 352.4
  Top Layer w5: U4.10 3815.63,3196.37 3831,3181 3991,3181 4028,3218 v1(4035,3218)
  Bottom Layer w5: v1(4035,3218) 4042.37,3218 C7.1
NetC8_1: C8.1 U4.20 | length 432.9
  Top Layer w5: U4.20 3835.32,3435.07 3838.25,3438 3858,3438 3905,3391 4026,3391 4054,3419 v1(4054,3531)
  Bottom Layer w5: v1(4054,3531) 4078.37,3531 C8.1
NetC15_2: C15.2 U6.49 | length 287.9
  Top Layer w5: U6.49 3743.7,3934.3 v1(3762,3916)
  Bottom Layer w5: v1(3762,3916) 3762,3930 3754.79,3937.21 3754.79,4034.68 3761.11,4041 3798.07,4041 3806,4048.93 3806,4094 C15.2
NetC19_2: C19.2 U6.73 | length 110.1
  Top Layer w5: C19.2 3212.83,4056.54 U6.73
NetD1_1: D1.1 R2.2 | length 92.9
  Bottom Layer w5: D1.1 4090,3785.63 R2.2
NetD2_1: D2.1 R3.2 | length 85
  Top Layer w5: D2.1 R3.2
NetD3_1: D3.1 R12.2 | length 435.5
  Top Layer w5: v1(3399,3028) 3472,3028 3530.69,3086.69 3530.69,3089.73 3543.94,3102.98 D3.1
  Bottom Layer w5: R12.2 3219,3021 3387.4,3021 3394.4,3028 v1(3399,3028)
NetD3_3: D3.3 R10.2 | length 689.3
  Top Layer w5: v1(3392,3117) 3415,3140 3609,3140 3620,3129 3620,3060 3636.08,3043.92 D3.3
  Bottom Layer w5: R10.2 3210.63,3250 3285,3250 3343.91,3191.09 3343.91,3165.09 v1(3392,3117)
NetD3_4: D3.4 R11.2 | length 480.5
  Top Layer w5: v1(3415,3094) 3419,3094 3452.23,3127.23 3602.57,3127.23 3607.55,3122.25 3607.55,3068.17 3583.31,3043.92 D3.4
  Bottom Layer w5: R11.2 3364,3060 3398,3094 v1(3415,3094)
NetR5_1: R5.1 U3.3 | length 943.7
  Bottom Layer w5: U3.3 3381.71,3524 v1(3452,3524) 3452,3869 3514,3931 3514,4035 3539,4060 3582.07,4060 3595,4072.93 R5.1
NetR7_2: R7.2 U3.16 | length 268.8
  Bottom Layer w5: U3.16 4010.35,3854.19 4051,3894.84 4051,3960 4000,4011 R7.2
NetR14_2: R14.2 U6.37 | length 682.3
  Top Layer w5: v1(3617,3716) 3634.46,3698.54 3706.46,3698.54 U6.37
  Bottom Layer w5: v1(3617,3716) 3511,3716 3490,3737 3490,3866 3489.07,3866.93 3489.07,3871.07 3535,3917 3593,3917 3593,4047 3607.81,4061.81 3607.81,4078.44 R14.2
NRST: C2.2 K1.1 R1.1 U6.14 | length 766.2
  Top Layer w5: U6.14 3429.37,3381.63 3442,3369 3442,3306.66 3450.83,3297.83 3481.75,3297.83 3516.46,3263.11 v1(3516.46,3231.54) ; v1(3690,3225) 3676.37,3225 R1.1 3636.37,3187 C2.2 3736.76,3186 3787.76,3135 K1.1
  Bottom Layer w5: v1(3516.46,3231.54) 3532.93,3248 3667,3248 v1(3690,3225)
OSC32_IN: C10.2 U6.8 Y2.2 | length 978
  Top Layer w5: v1(3217,3545) 3224.25,3545 3309.95,3459.3 3309.95,3421.82 U6.8
  Bottom Layer w5: v1(3217,3545) 3217,3560 3154,3623 3154,3670 3205,3721 3205,3809.12 3229,3833.12 3229,3839 3215,3853 3215,3909 3228,3922 3228,4059.13 3170,4117.13 Y2.2 3170,4132.87 3242.81,4205.69 3242.81,4208.44 C10.2
OSC32_OUT: C11.2 U6.9 Y2.1 | length 978.4
  Top Layer w5: v1(3220,3589) 3220,3584 3331,3473 3331,3420.58 U6.9
  Bottom Layer w5: v1(3220,3589) 3215.42,3589 3173.5,3630.92 3173.5,3653.5 3217,3697 3217,3803.5 3226,3812.5 3228.5,3812.5 3246,3830 3246,3841 3226,3861 3226,3903.62 3240,3917.62 3240,4115.01 Y2.1 3230.01,4132.87 3245.23,4148.09 3262.46,4148.09 C11.2
OSC_IN: C9.2 U6.12 Y1.1 | length 503.7
  Top Layer w5: C9.2 3234.02,3090.63 Y1.1 3247.32,3100 3268.45,3121.12 3268.45,3125.06 3290,3146.61 3290,3206 3301,3217 3340,3217 3350,3227 3350,3344 3390,3384 U6.12
OSC_OUT: C13.1 U6.13 Y1.3 | length 453.2
  Top Layer w5: Y1.3 3333.94,3166.93 Y1.3@3336.38,3169.37 ; U6.13 3409.68,3380.32 3430.5,3359.5 3430.5,3290.5 3399.66,3259.66 3376.66,3259.66 3368.82,3251.82 3368.82,3201.81 Y1.3@3336.38,3169.37 ; C13.1 Y1.3@3336.38,3169.37
PB1: R2.1 U6.36 | length 1209.8
  Top Layer w5: v1(3634,3854) 3592,3812 3592,3709 3622.61,3678.39 U6.36
  Bottom Layer w5: v1(3634,3854) 3820,3854 3840,3874 3840,3937.96 3836.96,3941 3830,3947.96 3830,4041 3879,4090 3879,4121 3883,4125 3936.07,4125 3939,4122.07 3939,4080 3943,4076 3966,4076 3971,4081 4023,4081 4046.18,4057.82 4046.18,4009.82 4065,3991 4065,3899.37 R2.1
SWCLK: P2.2 U6.76 | length 846
  Top Layer w5: v1(3089.35,3980.65) 3089.35,3957.13 3092.5,3953.98 U6.76
  Bottom Layer w5: v1(3089.35,3980.65) 3071.97,3998.03 3071.97,4494.97 3096,4519 3241,4519 P2.2
SWDIO: P2.3 U6.72 | length 633.9
  Top Layer w5: U6.72 3232.51,4052.48 3243,4062.97 3243,4102 v1(3271,4130)
  Bottom Layer w5: P2.3 3215,4445 3215,4408 3233,4390 3326,4390 3373,4343 3373,4200 3303,4130 v1(3271,4130)
USART1_RX: U2.6 U6.69 | length 502.1
  Top Layer w5: U6.69 3291.57,4066 3292,4066 3302,4076 3449,4076 3463,4090 3463,4157 3440,4180 3393,4180 3380,4193 3380,4230 3366.12,4243.88 U2.6
USART1_TX: U2.7 U6.68 | length 552.1
  Top Layer w5: U6.68 3311.25,4059.07 3314.18,4062 3460,4062 3480,4082 3480,4156 3438,4198 3404.5,4198 3395,4207.5 3395,4245 3375,4265 3375,4290 3371.12,4293.88 U2.7
USART2_RX: U3.22 U6.26 | length 329.2
  Top Layer w5: U6.26 3754.54,3481.54 v1(3761,3488)
  Bottom Layer w5: v1(3761,3488) 3761,3465 3844.25,3381.75 U3.22
USART2_TX: U3.21 U6.25 | length 381.6
  Top Layer w5: U6.25 3645.9,3444.27 3654.63,3453 3777,3453 3787.5,3442.5 3811.5,3442.5 3820,3451 3873,3451 v1(3876,3448) v1@3870.5,3442.5
  Bottom Layer w5: v1(3876,3448) 3890.93,3448 3905.93,3463 3973.43,3463 U3.21
USB_D+: TYPEC1.6 TYPEC1.8 U2.1 | length 914.9
  Top Layer w5: U2.1 3238.88,4343.88 3265,4370 3472.07,4370 3475,4372.93 3475,4405 3533,4463 3686,4463 3694.84,4454.16 3694.84,4360.16 3695,4360 3695,4332.95 ; 3694.84,4336.38 3694.84,4302.93 3697.77,4300 3727,4300 3734.21,4307.21 TYPEC1.6
USB_D-: TYPEC1.5 TYPEC1.7 U2.2 | length 999.2
  Top Layer w5: U2.2 3084.05,4293.88 3060,4317.93 3060,4360 3070,4370 3140,4370 3150,4360 3235,4360 3256,4381 3457.07,4381 3460,4383.93 3460,4408 3526,4474 3695,4474 3735,4434 3735,4409 ; TYPEC1.7@3714.53,4360 3714.53,4388.53 3735,4409 ; TYPEC1.5@3753.9,4360 3753.9,4390.1 3735,4409
V3.3: C1.1 C6.1 C12.2 C14.2 C16.2 C17.2 C18.2 C20.2 C21.2 C22.2 C23.2 C24.2 D1.2 D2.2 D3.2 H1.1 H1.4 H1.5 P1.2 P2.4 R1.2 R4.2 R5.2 R6.2 R8.2 R9.2 U1.2 U3.8 U4.8 U4.13 U5.3 U5.7 U5.8 U6.6 U6.11 U6.19 U6.21 U6.22 U6.28 U6.50 U6.75 U6.100 | length 13087.3
  Top Layer w10: U6.100 3087.84,3481.54 3087,3480.7 v1(3087,3428) 3087,3384 3178,3293 3276.37,3293 C24.2@3309,3260.37 ; v1(3113,4065) 3162.41,4015.59 3172.87,4015.59 U6.75 ; U6.6 3271.88,3324.12 3309,3287 C24.2@3309,3260.37 ; U6.11 3369.96,3420.17 3369.96,3385.59 C14.2 C24.2 C24.2@3309,3260.37 ; v1(3398.89,3202) 3492.3,3202 3507,3187.3 3507,3160.62 3512.86,3154.76 3605.1,3154.76 ; P1.2 3531,4120 3567,4084 3596,4084 3612,4100 3673,4100 3706.14,4133.14 3706.14,4161.34 D2.2 3753.2,4132 3855,4132 3869,4146 3987,4146 4008,4167 4034.14,4167 4040,4172.86 4040,4236 4065,4261 4065,4312.78 U1.2@4037.78,4340 ; U6.19 3527.44,3420.17 3527.44,3382.07 3516.37,3371 3483.23,3371 3477.37,3365.14 C16.2 3530.77,3279.6 3543.03,3279.6 R1.2 3572.11,3279.48 3572.11,3291.11 3610.31,3329.31 3623.69,3329.31 C22.2@3635.37,3341 ; U6.21 3567.16,3382.86 3573.02,3377 3589,3377 ; U6.22 3586.85,3379.15 3589,3377 ; v1(3620,3546) 3645.05,3520.95 3706.88,3520.95 U6.28 ; v1(3638,3919) 3639,3920 3639,3945 3647.98,3953.98 U6.50 ; U4.8 3776.26,3225.23 3773,3221.97 3773,3188 3794,3167 3889,3167 ; v1(3819,3928) 3819,4055.37 C12.2 3822.87,4051.5 U5.7 U5.8 ; U4.13 3923.23,3273.77 3923.23,3287.23 3951,3315 3979,3315 4013,3281 4134,3281 ; H1.1 4010.91,3405.91 4025,3420 4025,3459.1 4019.14,3464.96 H1.4 H1.5 4002.65,3484.65 4016,3498 4016,3563 4058,3605 v1(4134,3605) ; v1(3980.68,3157.68) 3932.32,3157.68 3923,3167 3889,3167 ; U1.2 U1.2@4037.78,4340 ; U5.3 4065.01,4082.99 4091,4057 v1(4091,3989) ; C1.1 4120,4370 4090,4340 ; 3589,3377 3600,3366 3600,3346.86 3605.86,3341 C22.2@3635.37,3341 ; C22.2@3635.37,3341 C22.2 3638.37,3309.37 3632,3303 3613,3303 3597,3287 3597,3164.86 3606.86,3155 3614,3155 3655.55,3113.45 3687.01,3113.45 D3.2 D3.2@3717.17,3102.98 ; D3.2@3717.17,3102.98 3861.98,3102.98 3889,3130 3889,3167 ; D3.2@3717.17,3102.98 3752.14,3068 4149,3068 4193,3112 4193,3191 4134,3250 4134,3281 ; U1.2@4037.78,4340 4090,4340 ; 4090,4340 4141,4340 4188,4293 v1(4188,4267) 4186,4265 4186,3657 v1(4134,3605) ; 4134,3281 v1(4134,3605)
  Bottom Layer w10: C23.2 3112,4013.04 3112,4064 v1(3113,4065) 3087,4091 3087,4132.63 3165.31,4210.94 C20.2 3110,4295.63 P2.4 3155,4495 3244,4495 3258,4481 3258,4413.86 3263.86,4408 3374,4408 3412,4370 3446,4370 3459,4383 3459,4410 3512,4463 3649,4463 3675.46,4436.54 3675.46,4308.28 R5.2@3680.74,4303 ; C21.2 3144,3428 v1(3087,3428) 3087,3301 3092.86,3295.14 3169.51,3295.14 R4.2 3231.37,3300.63 3251,3281 3328.14,3281 3334,3275.14 3334,3266.89 v1(3398.89,3202) ; U3.8 3365.71,3976.71 3509,4120 P1.2 ; v1(3620,3546) 3662.5,3503.5 3698.5,3503.5 3976,3226 4006,3196 4115,3196 4202,3283 4202,3936 4187.37,3950.63 C17.2@4106.63,3950.63 ; v1(3638,3919) 3649,3919 ; R5.2 3853.32,4290.31 3866,4303 3999,4303 4059.74,4363.74 R6.2 4127.74,4331 4182.14,4331 4188,4325.14 v1(4188,4267) ; v1(3819,3928) 3785,3894 3694,3894 3669,3919 3649,3919 ; v1(3980.68,3157.68) 3982.37,3159.37 C6.1 ; D1.2 4127,3625 4132.86,3619.14 4132.86,3606.14 v1(4134,3605) ; v1(4091,3989) 4091,3954.63 C17.2 C17.2@4106.63,3950.63 ; 3649,3919 3671,3941 3671,4056.63 C18.2 3670,4135.63 3670,4200 3687,4217 3867.37,4217 R8.2 3924.69,4159.69 3938.31,4159.69 3955,4143 3955,4100.86 3960.86,4095 4042,4095 4066,4071 4136.14,4071 4142,4076.86 4142,4142.37 R9.2 4170.33,4264.7 4185.7,4264.7 v1(4188,4267) ; C17.2@4106.63,3950.63 4106.63,3962.26 4109.69,3965.31 4114.86,3965.31 4115.54,3966 4155.45,3966 4188,3998.55 v1(4188,4267)
V5: C3.2 C4.2 TYPEC1.2 TYPEC1.11 U1.3 U2.5 | length 1452.2
  Top Layer w10: U2.5 3315.1,4196.71 3269.15,4196.71 3260,4205.86 3260,4300 3259.14,4300.86 3259.14,4309.14 3270,4320 3380,4320 3390,4310 3390,4270.63 C4.2 3465.63,4195 3641,4195 3679,4233 3679,4277 3682,4280 ; TYPEC1.11@3632.99,4360 3632.99,4293.01 3646,4280 3682,4280 ; TYPEC1.2 3821.97,4360.83 3821.97,4295 ; U1.3 4007.6,4280.93 3999.37,4272.71 C3.2 3984.69,4185.31 3984.69,4175.54 3974.14,4165 3890,4165 3880,4175 3880,4220 3821.97,4278.03 3821.97,4295 ; 3682,4280 3802,4280 3817,4295 3821.97,4295
pads on no net: H1. H1.22 TYPEC1. TYPEC1.3 TYPEC1.4 TYPEC1.9 TYPEC1.10 U2.4 U3.2 U3.4 U3.5 U3.6 U3.7 U3.9 U3.10 U3.11 U3.12 U3.13 U3.14 U3.17 U3.19 U3.20 U4. U4.2 U4.3 U4.4 U4.5 U4.6 U4.7 U4.14 U4.15 U4.16 U4.17 U4.19 U4.21 U4.22 U5. U6.1 U6.2 U6.3 U6.4 U6.5 U6.7 U6.15 U6.16 U6.17 U6.18 U6.38 U6.39 U6.40 U6.41 U6.47 U6.48 U6.59 U6.60 U6.61 U6.62 U6.66 U6.67 U6.78 U6.79 U6.80 U6.81 U6.82 U6.83 U6.84 U6.89 U6.90 U6.91 U6.92 U6.93 U6.95 U6.96 U6.97 U6.98

## Polygon pours and split planes (outlines as drawn)
no net on Mechanical 1 "NONET_L-01_P-001" (solid, remove dead copper): 3036,4612
GND on Top Layer "GND_L01_P012" (solid, remove dead copper, pour order 12): 2998,4616 3001,4619 4257,4619 4257,2985 2998,2985
no net on Top Layer "NONET_L01_P005" (solid, remove dead copper, pour order 5): 3030,4600
no net on Top Layer "NONET_L01_P004" (solid, remove dead copper, pour order 4): 3170,4601
GND on Bottom Layer "GND_L02_P013" (solid, remove dead copper, pour order 13): 3023,4610 4243,4610 4237,4604 4237,2981 3035,2981 3032,2984

## Keep-outs
Keep-Out Layer:
  lines w10: 3037.43,3154.77 3037.43,4429.57 ; 3037.43,3154.77 ccw(c3187.43,3154.77) 3187.43,3004.77 4068.53,3004.77 ccw(c4068.53,3154.77) 4218.53,3154.77 4218.53,4429.57 ; 3037.43,4449.26 cw(c3187.43,4449.26) 3187.43,4599.26 4068.53,4599.26 cw(c4068.53,4449.26) 4218.53,4449.26

## Other copper
Top Layer:

## Silkscreen, mask and mechanical layers (free items; w line width, h text height)
Top Overlay:
  text "C" at 3313,4522 h30
  text "D" at 3224,4520 h30
  text "G" at 3405,4520 h30
  text "V3" at 3113,4519 h30
  text "B0" at 3300,4105 h25
  text "V" at 3588,4105 h30
Mechanical 1:
  the board outline again, w10